# Altium PCB Flight-Controller.PcbDoc (part 2 of 3)
Units mm, origin at the board's own origin, x right, y up, seen from the top; angles counter-clockwise.
Board outline 68.4 x 90 mm, 8 copper layers (Top Layer (SIG), Int1 (GND), Int2 (PWR), Int3 (SIG), Int4 (GND), Int5 (SIG), Int6 (GND), Bottom Layer (SIG)), stack 1.559 mm thick; 188 components, 169 nets, 851 pads, 1097 vias.
Unrouted connection lines stored in the file: 2.
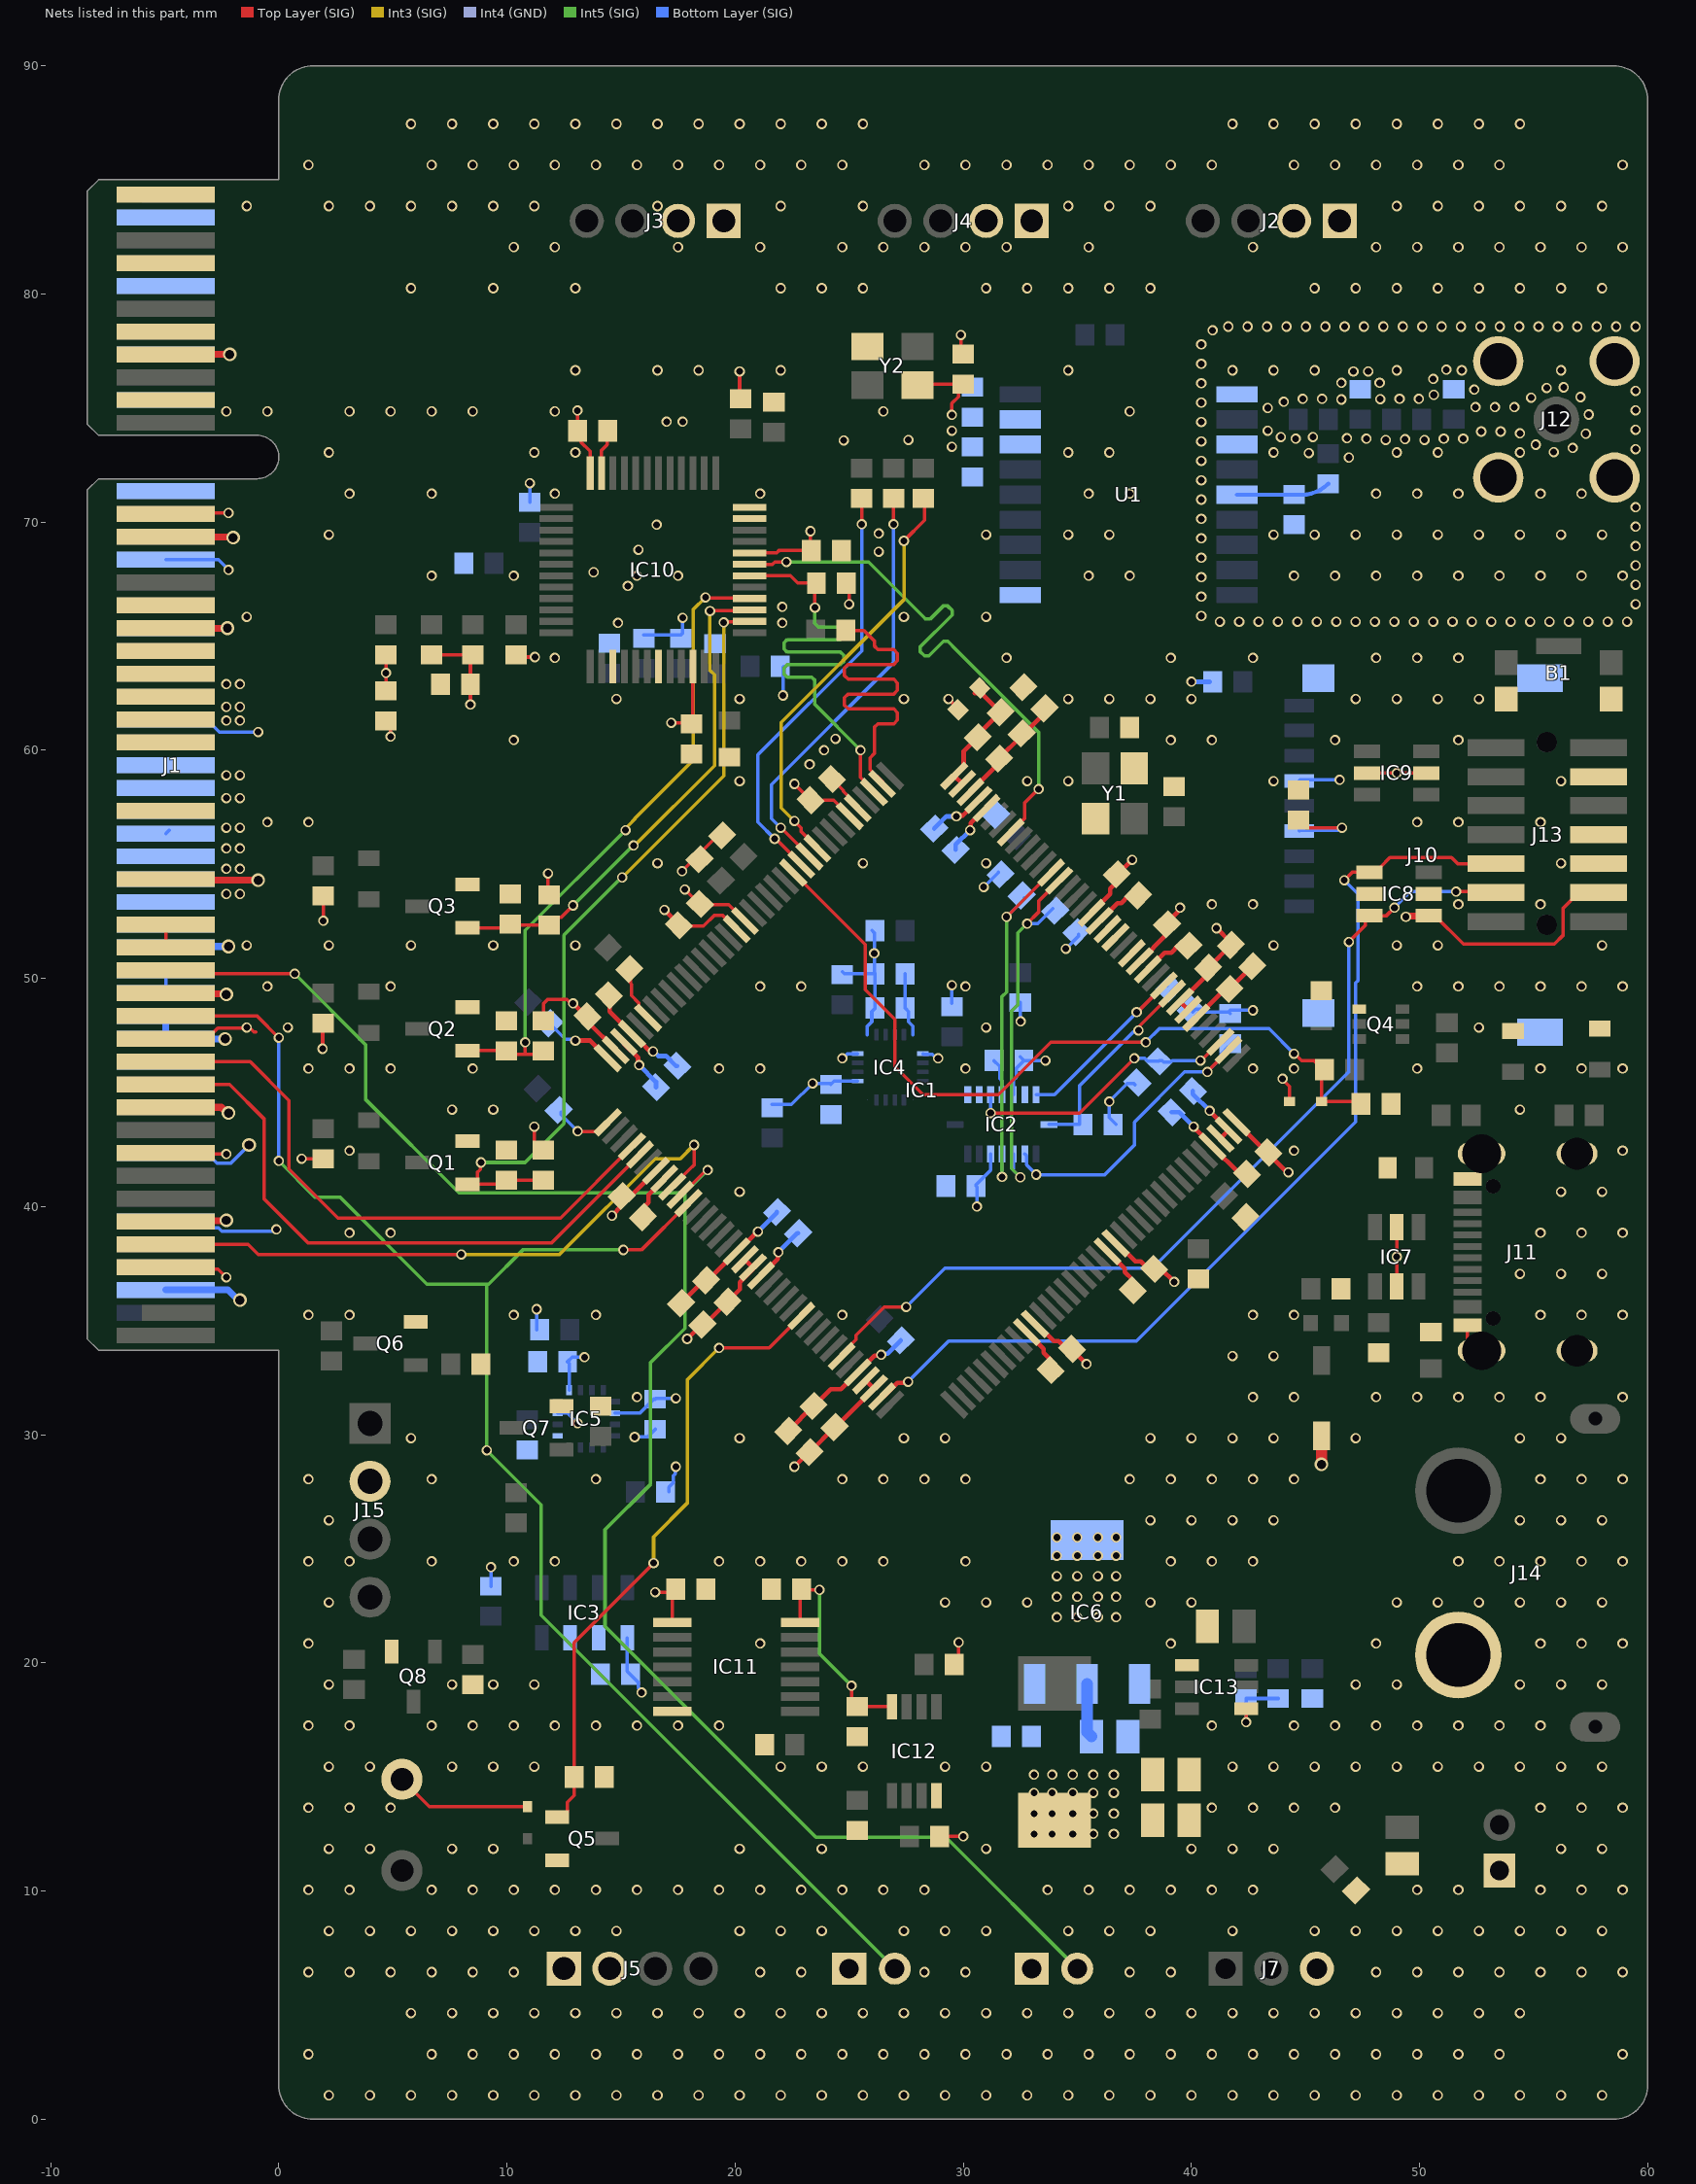
[diagram p8: the nets of this part, all layers, seen from the top]

## Part data
B1: "Tactile Switch SPST 300gf 1.9mm Gull Wing 4.6mm x 2.8mm Surface Mount", LCSC Part #=C99271, Manu Part #=KMR231GLFS
BZ1: "-40℃~+85℃ 2.7kHz 3V~7V 5.7mm 5V 60mA 80dB 9mm Electromagnetic Passive (Externally Driven) 插件,D=9mm Buzzers ROHS", LCSC Part #=C161819, Manu Part #=QMB-09B-05
C1 C42 C64 C65: library part CL21A226MAQNNNE, "22uF ±20% 25V Ceramic Capacitor X5R 0805", LCSC Part #=C45783, Manu Part #=CL21A226MAQNNNE
C2 C3 C5 C6 C7 C8 C9 C10 C11 C12 C13 C14 C15 C16 C17 C21 C22 C24 C26 C29 C30 C31 C32 C34 C37 C40 C44 C49 C50 C52 C53 C54 C56 C57 C58 C59 C60 C61 C62: library part CC0603KRX7R9BB104, "50V 100nF X7R ±10% 0603 Multilayer Ceramic Capacitors MLCC - SMD/SMT ROHS", LCSC Part #=C14663, Manu Part #=CC0603KRX7R9BB104
C4 C18 C25 C36 C51: library part CL10A105KB8NNNC, "50V 1uF X7R ±10% 0603 Multilayer Ceramic Capacitors MLCC - SMD/SMT ROHS", LCSC Part #=C15849, Manu Part #=CL10A105KB8NNNC
C19 C20 C35: library part CL10A225KO8NNNC, "2.2 µF ±10% 25V Ceramic Capacitor X5R 0603 (1608 Metric)", LCSC Part #=C23630, Manu Part #=CL10A225KO8NNNC
C23: library part CL10A475KO8NNNC, "16V 4.7uF X5R ±10% 0603 Multilayer Ceramic Capacitors MLCC - SMD/SMT ROHS", LCSC Part #=C19666, Manu Part #=CL10A475KO8NNNC
C27 C28: library part CL10C120JB8NNNC, "12pF ±1% 50V Ceramic Capacitor NP0 0603", LCSC Part #=C38523, Manu Part #=CL10C120JB8NNNC
C33 C39 C45: library part 0603B103K500NT, "10nF ±10% 50V Ceramic Capacitor X7R 0603", LCSC Part #=C57112, Manu Part #=0603B103K500NT
C38 C41 C43 C55: library part CL10A106KP8NNNC, "10uF ±10% 10V Ceramic Capacitor X5R 0603", LCSC Part #=C19702, Manu Part #=CL10A106KP8NNNC
C46 C66: library part CL10C470JB8NNNC, "47 pF ±5% 50V Ceramic Capacitor C0G, NP0 0603 (1608 Metric)", LCSC Part #=C1671, Manu Part #=CL10C470JB8NNNC
C47 C48: library part CC0603KRX7R9BB103, "10nF ±10% 50V Ceramic Capacitor X7R 0603", LCSC Part #=C100042, Manu Part #=CC0603KRX7R9BB103
C63: library part GRM21BR61H106KE43L, "10uF 50V X5R ±10% 0805 Multilayer Ceramic Capacitors MLCC - SMD/SMT ROHS", LCSC Part #=C440198, Manu Part #=GRM21BR61H106KE43L
D1: "25A 1 Independent 40V 450mV@1A 1A SOD-123 Single Diodes RoHS", LCSC Part #=C82544, Manu Part #=1N5819HW-7-F
D2 D3: "Diode 30V 200mA Surface Mount SOD-523", LCSC Part #=C81572, Manu Part #=BAT54XV2T1G
FB1: library part BLM18AG601SN1D, "380mΩ ±25% 600Ω@100MHz 0603 Ferrite Beads ROHS", LCSC Part #=C19330, Manu Part #=BLM18AG601SN1D
FB2: library part BLM18SG330SN1D, "33Ω@100MHz 1 Line Ferrite Bead 0603 6A 8mΩ", LCSC Part #=C576399, Manu Part #=BLM18SG330SN1D
IC1: "Dual 32-bit Arm Cortex-M7 and -M4 MCUs, up to 2MB Flash, 1MB RAM, 46 com. and analog interfaces, SMPS", LCSC Part #=C730193, Manu Part #=STM32H745ZIT6
IC2: "Inertial Measurement Unit IMU 6-Axis LGA", LCSC Part #=C194919, Manu Part #=BMI088
IC3: "Barometric Pressure Sensor, with Stainless Steel Cap, 1.8 to 3.6 V, -45 to 85 degC, 8-Pin QFN, RoHS, Tape and Reel", LCSC Part #=C15639, Manu Part #=MS561101BA03-50
IC4: "LGA24-3x3 IMUs (Inertial Measurement Units) RoHS", LCSC Part #=C5360621, Manu Part #=ICM-40609-D
IC5: "±8 Gauss, High Performance 3-axis Magnetic Sensor", LCSC Part #=C404329, Manu Part #=MMC5983MA
IC6: "70dB@(120Hz) 1.35A Fixed 3.3V Positive 10V SOT-223 Voltage Regulators - Linear, Low Drop Out (LDO) Regulators ROHS", LCSC Part #=C6186, Manu Part #=AMS1117-3.3
IC7 IC8 IC9: "Clamp Ipp Tvs Diode Surface Mount SOT-23-6", LCSC Part #=C495220, Manu Part #=ESDA6V1BC6
IC10: "Single Port 10/100 Mb/s Ethernet Physical Layer Transceiver", LCSC Part #=C12082, Manu Part #=DP83848IVVX/NOPB
IC11: "4-Bit Bidirectional Voltage-Level Translator For Open-Drain and Push-Pull Applications", LCSC Part #=C44955, Manu Part #=TXS0104EPWR
IC12: "SN74LVC2G241 Dual Buffer and Driver with Three-State Outputs", LCSC Part #=C2676069, Manu Part #=SN74LVC2G241DCTR
IC13: "3.8V to 32V Input, 3A Low IQ Synchronous Buck Converter with Enhanced EMI Reduction", LCSC Part #=C2158012, Manu Part #=AP63300WU-7
J1: "PCIe x8"
J2 J3 J4 J5: "Connector Header 4 position 2mm Pitch 2A Right Angle -25℃~+85℃", LCSC Part #=C157926, Manu Part #=S4B-PH-K-S(LF)(SN)
J6 J8 J9: "Connector Header 2 position 2mm Pitch 2A Right Angle -25℃~+85℃", LCSC Part #=C173752, Manu Part #=S2B-PH-K-S(LF)(SN)
J7: "Connector Header 3 position 2mm Pitch 2A Right Angle -25℃~+85℃", LCSC Part #=C157929, Manu Part #=S3B-PH-K-S(LF)(SN)
J10: "Micro SD card (TF card) Connector and Ejector Push-Push Surface Mount", LCSC Part #=C41426929, Manu Part #=TF-01A
J11: "USB 2.0 3A 1 Surface Mount, Right Angle 16P Female -40℃~+85℃ Type-C SMD USB Connectors ROHS", LCSC Part #=C2988369, Manu Part #=GT-USB-7010ASV
J12: "Connector Receptacle SMA Female Pin 50Ω Through Hole Right Angle", LCSC Part #=C496551, Manu Part #=BWSMA-KWE-Z001
J13: "Pin Header 2 1mm 4mm 14P -40℃~+105℃ 1.27mm 1A 250V 2x7P 1.27mm SMD,P=1.27mm Headers, Male Pins RoHS", LCSC Part #=C6332251, Manu Part #=HB-PH9-12727PB2GOB
J14: "Horizontal plug Yellow - Power connector / plug connector", LCSC Part #=C428722, Manu Part #=XT60PW-F
J15: "4 Position Wire to Board Terminal Block Through Hole 2.54mm", LCSC Part #=C918122, Manu Part #=DB125-2.54-4P-GN-S
L1: library part LQG18HN27NJ00D, "27 nH Unshielded Multilayer Inductor 500 mA 550mOhm Max 0603 (1608 Metric)", LCSC Part #=C162550, Manu Part #=LQG18HN27NJ00D
L2: library part FXL0630-6R8-M, "48mΩ 5A 6.8uH 6A Molded Inductor ±20% SMD,7x6.6mm Power Inductors ROHS", LCSC Part #=C167221, Manu Part #=FXL0630-6R8-M
LED1 LED3: library part KT-0603R, "-40℃~+85℃ 1.8V~2.4V 120° 20mA 300mcd 40mW 615nm~630nm 645nm Discrete Diode Red Water Clear 0603 LED Indication - Discrete ROHS", LCSC Part #=C2286, Manu Part #=KT-0603R
LED2 LED4: library part SML-E12P8WT86, "Green LED Indication - Discrete 2.2V 0603", LCSC Part #=C126319, Manu Part #=SML-E12P8WT86
LED5: library part SML-D12Y1WT86, "Yellow LED Indication - Discrete 2.2V 0603", LCSC Part #=C253534, Manu Part #=SML-D12Y1WT86
Q1 Q2 Q3 Q5 Q6 Q7 Q8: "N-Channel 60V 300mA 830mW Surface Mount SOT-23", LCSC Part #=C8545, Manu Part #=2N7002
Q4: "N-Channel+P-Channel Array 60V 130mA 200mW Surface Mount SOT-363", LCSC Part #=C156386, Manu Part #=BSS8402DW-7-F
R1 R29 R30 R31 R64 R66 R68: library part 0603WAF4700T5E, "-55℃~+155℃ 100mW 470Ω 75V Thick Film Resistor ±1% ±100ppm/℃ 0603 Chip Resistor - Surface Mount ROHS", LCSC Part #=C23179, Manu Part #=0603WAF4700T5E
R2 R27 R28: library part 0603WAF0000T5E, "0Ω 100mW 75V Thick Film Resistor ±1% 0603 Chip Resistor - Surface Mount RoHS", LCSC Part #=C21189, Manu Part #=0603WAF0000T5E
R3 R9 R10 R11 R12 R13 R14 R15 R16 R17 R18 R19 R20 R21 R22 R23 R48 R53 R54 R55 R56 R59 R61 R63 R65 R67 R69: library part 0603WAF1002T5E, "100mW Thick Film Resistor 75V ±100ppm/℃ ±1% 10kΩ 0603 Chip Resistor - Surface Mount ROHS", LCSC Part #=C25804, Manu Part #=0603WAF1002T5E
R4 R6 R24 R60: library part 0603WAF1001T5E, "100mW 1kΩ 75V Thick Film Resistor ±100ppm/℃ ±1% 0603 Chip Resistor - Surface Mount RoHS", LCSC Part #=C21190, Manu Part #=0603WAF1001T5E
R5 R7 R8 R41 R44 R45 R49: library part 0603WAF330JT5E, "100mW 33Ω 75V Thick Film Resistor ±100ppm/℃ ±1% 0603 Chip Resistor - Surface Mount RoHS", LCSC Part #=C23140, Manu Part #=0603WAF330JT5E
R25 R26: library part RC0603FR-075K1L, "100mW 5.1kΩ 75V Thick Film Resistor ±100ppm/℃ ±1% 0603 Chip Resistor - Surface Mount RoHS", LCSC Part #=C105580, Manu Part #=RC0603FR-075K1L
R32 R33 R34 R35 R36 R37 R38 R39 R40 R47: library part 0603WAF2201T5E, "2.2kΩ ±1% 100mW 0603 Thick Film Resistor", LCSC Part #=C4190, Manu Part #=0603WAF2201T5E
R42 R43 R50 R51: library part 0603WAF499JT5E, "-55℃~+155℃ 100mW 49.9Ω 75V Thick Film Resistor ±1% ±100ppm/℃ 0603 Chip Resistor - Surface Mount ROHS", LCSC Part #=C23185, Manu Part #=0603WAF499JT5E
R46: library part 0603WAF1501T5E, "100mW 1.5kΩ 75V Thick Film Resistor ±100ppm/℃ ±1% 0603 Chip Resistor - Surface Mount RoHS", LCSC Part #=C22843, Manu Part #=0603WAF1501T5E
R52: library part RC0603FR-074K87L, "4.87kΩ 100mW 75V Thick Film Resistor ±100ppm/℃ ±1% 0603 Chip Resistor - Surface Mount RoHS", LCSC Part #=C137709, Manu Part #=RC0603FR-074K87L
R57: library part 0603WAF1583T5E, "-55℃~+155℃ 100mW 158kΩ 75V Thick Film Resistor ±1% ±100ppm/℃ 0603 Chip Resistor - Surface Mount ROHS", LCSC Part #=C22883, Manu Part #=0603WAF1583T5E
R58: library part 0603WAF3002T5E, "-55℃~+155℃ 100mW 30kΩ 75V Thick Film Resistor ±1% ±100ppm/℃ 0603 Chip Resistor - Surface Mount ROHS", LCSC Part #=C22984, Manu Part #=0603WAF3002T5E
R62: library part 0603WAF1200T5E, "-55℃~+155℃ 100mW 120Ω 75V Thick Film Resistor ±1% ±100ppm/℃ 0603 Chip Resistor - Surface Mount ROHS", LCSC Part #=C22787, Manu Part #=0603WAF1200T5E
U1: "Standard precision GNSS module", LCSC Part #=C4153167, Manu Part #=MAX-M10S-00B
Y1: library part XC32M4-24.000-F12NJDTL, "Crystal 24MHz ±10ppm 12pF 50Ω SMD3225-4P", LCSC Part #=C5122304, Manu Part #=XC32M4-24.000-F12NJDTL
Y2: "Oscillator 50MHz ±20ppm CMOS 1.62V~3.63V SMD3225-4P", LCSC Part #=C2901592, Manu Part #=SX3M50.000M20F30TNN

## Via types
v1: diameter 0.45, hole 0.3, Top Layer (SIG) to Bottom Layer (SIG), tented both sides, 1085 vias
v2: diameter 0.6, hole 0.4, Top Layer (SIG) to Bottom Layer (SIG), tented both sides, 12 vias

## Nets (pads, with @x,y where several pads share a name; then routed paths per layer and width w, separated by ;. In a path a pad name is that pad's centre, name@x,y a point inside that pad or via, vN(x,y) a via of type N, cw(c..) or ccw(c..) an arc to the next point about the centre after c; other vN are vias at no path point)
+3V3: C3.2 C4.2 C5.2 C6.2 C7.2 C8.2 C9.2 C10.2 C11.2 C12.2 C13.2 C14.2 C15.2 C16.2 C21.2 C22.2 C23.2 C24.2 C25.2 C29.2 C30.2 C31.2 C32.2 C33.2 C34.2 C35.2 C36.2 C37.2 C42.2 C43.2 C44.2 C49.2 C50.2 C51.2 C53.2 C57.2 C58.2 C60.2 D3.1 FB1.1 IC1.7 IC1.8 IC1.13 IC1.19 IC1.32 IC1.42 IC1.56 IC1.70 IC1.71 IC1.79 IC1.90 IC1.91 IC1.92 IC1.105 IC1.106 IC1.119 IC1.129 IC1.142 IC1.143 IC1.144 IC2.3 IC2.11 IC3.1 IC4.8 IC4.13 IC5.2 IC5.13 IC6.2 IC6.4 IC8.1 IC10.22 IC10.32 IC10.48 IC11.1 J1.8 J1.14 J1.18 J1.20 J1.21 J1.22 J1.29 J1.34 J1.39 J1.44 J1.57 J1.67 J1.81 J1.84 J1.85 J1.90 J1.96 J3.2 J4.2 J5.2 J10.4 J13.3 R4.1 R6.1 R9.1 R10.1 R11.2 R12.2 R13.1 R14.1 R15.1 R16.2 R17.2 R18.2 R19.2 R20.2 R21.2 R22.2 R23.2 R29.2 R30.2 R31.2 R32.2 R33.2 R34.2 R38.2 R39.2 R42.2 R43.2 R46.1 R47.1 R48.1 R50.1 R51.1 U1.7 U1.8 Y2.4 | length 188.8
  Top Layer (SIG) w0.15: v1(1,42.1) 1.811,42.1 R29.2@1.95,41.961 ; v1(1.917,46.917) 1.925,46.925 1.925,47.875 R30.2@1.95,47.9 ; v1(1.95,52.525) R31.2@1.95,53.478 ; C57.2@4.7,62.6 v1(4.7,63.39) R42.2@4.7,64.18 ; R43.2@6.7,64.18 R51.1@8.5,64.18 8.4,64.08 C53.2@8.4,62.9 v1(8.4,62) ; R50.1@10.4,64.18 10.496,64.084 v1(11.224,64.084) ; v1(11.2,43.5) 11.205,43.495 11.205,42.825 11.405,42.625 R32.2@11.6,42.625 ; R33.2@11.6,48.275 11.6,48.9 11.784,49.084 12.635,49.084 12.819,48.9 v1(12.9,48.9) ; v1(11.8,54.6) 11.8,53.853 R34.2@11.85,53.803 ; v1@13.09,74.971 C50.2@13.09,74 13.25,73.84 13.25,73.5 13.65,73.1 IC10.48@13.65,72.138 ; v1(16.5,23.1) 17.265,23.1 C60.2@17.39,23.225 17.25,23.085 IC11.1@17.25,21.775 ; v1(17.2,61.2) 18.06,61.2 C51.2@18.1,61.16 18.15,61.21 IC10.22@18.15,63.662 ; C7.2@17.533,52.333 17.572,52.294 18.619,52.294 19.096,52.771 19.449,52.771 20.057,52.163 IC1.56@20.077,52.163 ; v1(17.675,54.7) R4.1@18.309,55.334 ; R4.1@18.309,55.341 R6.1@19.334,56.366 ; v1(20.2,76.6) 20.2,75.6 R47.1@20.25,75.55 ; IC10.32@20.638,68.65 21.825,68.65 21.925,68.75 C49.2@23.34,68.75 23.3,68.79 v1(23.3,69.6) ; v1(22.6,58.525) 23.308,57.817 C5.2@23.308,57.808 ; C5.2@23.347,57.769 23.828,57.769 23.867,57.808 24.325,57.808 25.021,57.112 IC1.42@25.027,57.112 ; v1(25,66.4) 25,67.3 R46.1@25.025,67.325 ; Y2.4@28,76 28.04,76.04 C58.2@30,76.04 29.788,75.828 29.788,75.488 29.5,75.2 v1(29.5,74.7) ; v1(29.35,62.25) 29.773,61.827 FB1.1@29.773,61.773 ; v1(44,45.6) 44,45.564 44.3,45.264 D3.1@44.3,44.6 ; C29.2@44.7,56.94 45.04,56.6 v1(46.6,56.6) ; IC8.1@50.4,52.75 50.675,52.75 51.925,51.5 55.9,51.5 56.3,51.9 56.3,53.09 56.97,53.76 J13.3@57.85,53.76
  Top Layer (SIG) w0.2: v1(12.9,48.9) 13.467,48.333 C6.2@13.533,48.333 13.533,48.099 IC1.71@14.773,46.859 ; v1(14.6,39.6) 14.6,39.605 15.033,40.038 C8.2@15.033,40.467 15.435,40.467 IC1.79@16.541,41.573 ; IC1.70@15.127,47.213 15.127,47.142 15.752,46.517 15.752,46.248 v1(15.8,46.2) ; v1(16.9,53) 17.533,52.367 C7.2@17.533,52.333 ; v1(17.9,34.2) 18.533,34.833 C25.2@18.567,34.833 18.667,34.833 C24.2@19.667,35.833 20.207,36.374 20.207,36.683 20.784,37.26 IC1.91@20.784,37.33 IC1.90@20.43,37.684 ; IC1.92@21.137,36.977 21.866,37.705 21.866,37.966 v1(21.9,38) ; v1(22.6,28.6) 23.233,29.233 C23.2@23.267,29.233 C9.2@24.367,30.333 ; C9.2@24.3,30.24 IC1.106@26.087,32.027 ; C9.2@24.38,30.32 IC1.106@26.087,32.027 ; IC1.105@25.734,32.381 IC1.106@26.087,32.027 ; v1(30.3,56.5) 30.332,56.532 30.332,56.81 30.988,57.466 IC1.32@31.02,57.466 ; IC1.119@33.141,34.855 33.212,34.855 33.967,34.1 34.177,34.1 34.51,33.767 C15.2@34.767,33.767 34.767,33.733 v1(35.4,33.1) ; IC1.19@35.616,52.87 36.446,53.7 36.446,53.93 36.733,54.217 C12.2@36.733,54.567 36.767,54.567 v1(37.4,55.2) ; IC1.129@36.677,38.391 36.747,38.391 37.539,37.6 37.777,37.6 38.11,37.267 38.683,37.267 v1(39.25,36.7) ; IC1.13@37.737,50.748 38.933,51.944 38.933,52.433 39.452,52.952 39.452,53.052 v1(39.5,53.1) ; IC1.7@39.859,48.627 IC1.8@39.505,48.981 40.733,50.209 C3.2@40.733,50.467 C4.2@41.733,51.467 41.733,51.567 v1(41.1,52.2) ; v1(40.8,44.2) 40.8,44.184 41.627,43.357 IC1.143@41.627,43.341 IC1.142@41.273,42.987 ; IC1.144@41.98,43.694 43.308,42.367 C11.2@43.367,42.367 43.367,42.333 44.2,41.5 v1(44.25,41.5)
  Top Layer (SIG) w0.3: J1.44@-4.95,39.35 -4.925,39.375 -2.325,39.375 v2(-2.3,39.4) ; J1.39@-4.95,44.35 -2.514,44.35 -2.264,44.1 v2(-2.2,44.1) ; J1.34@-4.95,49.35 -4.925,49.325 -2.325,49.325 v2(-2.3,49.3) ; J1.29@-4.95,54.35 -4.9,54.3 v2(-0.9,54.3) ; J1.18@-4.95,65.35 v2(-2.25,65.35) ; J1.14@-4.95,69.35 -4.935,69.335 -2.015,69.335 v2(-2,69.32) ; J1.8@-4.95,77.35 v2(-2.15,77.35) ; v1(49.4,52.7) 49.425,52.725 50.375,52.725 IC8.1@50.4,52.75
  Int4 (GND) w0.3: v2(-2.35,47.35) v2@-2.3,47.3
  Bottom Layer (SIG) w0.15: J1.90@-4.95,42.35 -3.15,42.35 -2.7,41.9 -2.1,41.9 v2(-1.3,42.7) ; R14.1@9.3,23.36 v1(9.3,24.2) ; R48.1@11,70.86 v1(11,71.7) ; R23.2@11.3,34.6 v1(11.3,35.5) ; C37.2@12.66,33.2 12.86,33.4 v1(13.4,33.4) ; IC5.13@12.725,31.96 C37.2@12.725,33.135 ; IC5.2@14.735,30.95 15.835,30.95 16.445,31.56 C36.2@16.5,31.56 16.54,31.6 v1(17.4,31.6) ; IC3.1@15.275,21.1 15.275,19.635 15.75,19.16 15.75,18.931 15.9,18.781 v1(15.9,18.7) ; R38.2@16,65.05 17.625,65.05 17.7,65.125 v1(17.7,65.8) ; R15.1@17.108,27.508 17.108,27.703 17.3,27.895 17.3,28.2 17.382,28.282 17.382,28.582 v1(17.4,28.6) ; R13.1@21.625,44.475 22.475,44.475 v1(23.4,45.4) 24.16,45.4 C33.2@24.2,45.36 24.34,45.5 IC4.8@25.37,45.5 ; R21.2@24.7,50.3 24.8,50.2 C35.2@26.14,50.2 ; IC4.13@25.8,47.525 25.8,47.9 25.993,48.093 25.993,48.553 C34.2@26.14,48.7 C35.2@26.14,50.2 ; R9.1@26,52.1 26.1,52 v1(26.1,51.1) 26.1,50.24 C35.2@26.14,50.2 ; R22.2@29.5,48.9 v1(29.5,49.7) ; C30.2@30.56,40.9 30.6,40.86 v1(30.6,40) ; C30.2@30.56,40.955 31.2,41.595 IC2.11@31.2,42.3 ; v1(30.9,54) 31.534,54.634 R19.2@31.534,54.666 ; IC2.3@32.2,44.9 32.2,45.543 32.32,45.663 32.32,46.06 C31.2@32.66,46.4 ; C31.2@32.5,46.56 C31.2@32.66,46.4 ; R10.1@32.5,48.94 32.5,48.129 v1(32.513,48.117) ; v1(33.6,46.4) C31.2@32.66,46.4 ; v1(34.5,51.3) 35.066,51.866 R20.2@35.066,51.934 ; R17.2@36.7,43.6 36.4,43.9 v1(36.4,44.6) 37.193,45.393 37.476,45.393 R12.2@37.534,45.334 ; R18.2@40.066,48.534 40.194,48.663 40.477,48.663 40.605,48.534 41.626,48.534 R11.2@41.7,48.46 ; R11.2@41.687,48.587 41.7,48.6 v1(42.7,48.6) ; J10.4@44.72,56.46 44.76,56.5 46.419,56.5 46.519,56.6 v1(46.6,56.6)
  Bottom Layer (SIG) w0.2: v1(15.8,46.2) 16.533,45.467 C21.2@16.533,45.233 ; v1(21.9,38) 22.733,38.833 C16.2@22.767,38.833 ; C13.2@29.667,55.633 29.667,55.867 v1(30.3,56.5) ; v1(40,63) R16.2@40.8,63 ; C22.2@40.067,45.067 40.067,44.933 v1(40.8,44.2)
  Bottom Layer (SIG) w0.3: J1.96@-4.95,36.35 -2.231,36.35 -1.781,35.9 v2(-1.7,35.9) ; J1.84@-4.95,48.35 J1.85@-4.95,47.35 v2(-2.35,47.35) ; J1.81@-4.95,51.35 -4.9,51.4 v2(-2.2,51.4) ; J1.67@-4.95,65.35 v2(-2.25,65.35) ; J1.57@-4.95,77.35 v2(-2.15,77.35)
  Bottom Layer (SIG) w0.5: IC6.2@35.425,19.075 35.425,16.975 C42.2@35.625,16.775
  other v1: 34.1,22 35,22 35.9,22 36.7,22 34.1,22.9 35,22.9 35.9,22.9 36.7,22.9 34.1,23.8 35,23.8 35.9,23.8 36.7,23.8 34.1,24.7 35,24.7 35.9,24.7 36.7,24.7 34.1,25.5 35,25.5 35.9,25.5 36.7,25.5 -2.3,61.3 -1.7,61.3 -2.3,61.9 -1.7,61.9 -2.3,62.9 -1.7,62.9 29.5,73.3 29.5,74 13.09,74.89
+3V3_RF: C45.2 L1.2 U1.14 | length 4.1
  Bottom Layer (SIG) w0.185: U1.14@42,71.2 C45.2@44.5,71.2 44.841,71.2 ccw(c44.841,72.839) L1.2@46,71.68
"+3V3A FC": C17.2 C18.2 FB1.2 IC1.35 IC1.36 | length 5.6
  Top Layer (SIG) w0.2: IC1.35@29.959,58.527 IC1.36@29.606,58.88 30.021,59.296 30.021,59.955 C17.2@30.633,60.567 30.633,60.667 C18.2@31.633,61.667 30.8,62.5 FB1.2@30.5,62.5
+5V: BZ1.1 C41.2 C59.2 C61.2 C64.2 C65.2 C66.2 D1.1 D2.1 IC6.3 IC11.14 IC12.8 IC13.1 J1.73 J1.74 J1.75 J1.76 J1.77 J1.78 J1.79 J2.2 J15.2 L2.2 R53.2 R54.2 R57.2 | length 22
  Top Layer (SIG) w0.15: BZ1.1@5.4,14.9 6.6,13.7 D2.1@10.9,13.7 ; IC11.14@22.85,21.775 22.85,23.165 C61.2@22.91,23.225 22.935,23.2 v1(23.7,23.2) ; v1(25.1,19) 25.1,18.28 25.295,18.085 C59.2@25.35,18.085 26.865,18.085 IC12.8@26.875,18.075 ; R54.2@29.1,12.4 v1(30,12.4) ; R53.2@29.75,19.925 29.8,19.975 v1(29.8,20.9) ; v1(42.4,17.4) IC13.1@42.4,18
  Top Layer (SIG) w0.5: v2(45.7,28.7) D1.1@45.7,29.95
  Int5 (SIG) w0.15: v1(23.7,23.2) 23.7,20.4 v1(25.1,19)
  Bottom Layer (SIG) w0.15: J1.76@-4.95,56.35 J1.76@-4.8,56.5 ; v1(42.4,17.4) C66.2@42.4,18.44 R57.2@43.8,18.44
  other v1: 33.1,12.5 33.9,12.5 34.8,12.5 35.7,12.5 36.6,12.5 33.1,13.4 33.9,13.4 34.8,13.4 35.7,13.4 36.6,13.4 33.1,14.3 33.9,14.3 34.8,14.3 35.7,14.3 36.6,14.3 33.1,15.1 33.9,15.1 34.8,15.1 35.7,15.1 36.6,15.1 -2.3,53.7 -1.7,53.7 -2.3,54.8 -1.7,54.8 -2.3,55.7 -1.7,55.7 -2.3,56.6 -1.7,56.6 -2.3,57.9 -1.7,57.9 -2.3,58.9 -1.7,58.9
ADC1_INP9: D3.2 IC1.49 R60.1 R62.2 | length 34.6
  Top Layer (SIG) w0.15: IC1.49@22.552,54.638 25.7,51.489 25.7,49.5 27,48.2 27,46.134 28.234,44.9 31.534,44.9 33.834,47.2 v1(38,47.2) ; v1(44.5,46.7) 44.536,46.7 44.836,46.4 45.375,46.4 45.7,46.075 D3.2@45.7,44.6 47.1,44.6 R62.2@47.3,44.4
  Bottom Layer (SIG) w0.15: v1(38,47.2) 38.6,47.8 43.4,47.8 v1(44.5,46.7)
AGND: C17.1 C18.1 IC1.34 R2.2 | length 5
  Top Layer (SIG) w0.2: IC1.34@30.313,58.173 31.567,59.427 C17.1@31.567,59.633 32.567,60.633 C18.1@32.567,60.733 32.665,60.733 R2.2@33.666,61.734
"AN0 / LED_LINK": IC10.28 Q2.1 R33.1 R36.2 | length 28.6
  Top Layer (SIG) w0.15: Q2.1@8.275,46.837 9.813,46.837 9.975,46.675 10.8,46.675 ; v1(10.8,47.2) 10.8,46.675 ; R33.1@11.6,46.675 10.8,46.675 ; v1(18.7,66.7) 18.725,66.675 20.613,66.675 IC10.28@20.638,66.65
  Int5 (SIG) w0.15: v1(10.8,47.2) 10.8,52.1 v1(15.2,56.5)
  Int3 (SIG) w0.15: v1(15.2,56.5) 15.2,56.581 15.328,56.709 15.618,56.999 15.618,57.018 18.175,59.575 18.175,66.175 v1(18.7,66.7)
"AN1 / LED_SPEED": IC10.27 Q3.1 R34.1 R37.2 | length 22.5
  Top Layer (SIG) w0.15: Q3.1@8.275,52.214 9.989,52.214 R37.2@10.15,52.375 10.182,52.343 R34.1@11.905,52.343 ; R34.1@11.85,52.343 12.19,52.683 12.383,52.683 v1(12.9,53.2) ; v1(18.9,66.1) 18.925,66.125 20.613,66.125 IC10.27@20.638,66.15
  Int5 (SIG) w0.15: v1(12.9,53.2) 12.912,53.2 15.537,55.825 v1(15.55,55.825)
  Int3 (SIG) w0.15: v1(15.55,55.825) 15.6,55.825 19.1,59.325 19.1,63.3 18.9,63.5 v1(18.9,66.1)
"AN_EN / LED_ACT": IC10.26 Q1.1 R32.1 R35.2 | length 34.9
  Top Layer (SIG) w0.15: Q1.1@8.275,40.978 Q1.1@8.475,40.978 ; v1(8.863,41.933) 8.83,41.899 8.83,41.63 8.7,41.5 8.7,41.203 Q1.1@8.475,40.978 ; R32.1@11.6,41.165 R35.2@9.975,41.165 9.788,40.978 Q1.1@8.475,40.978 ; v1(19.5,65.6) 19.525,65.625 20.613,65.625 IC10.26@20.638,65.65
  Int5 (SIG) w0.15: v1(8.863,41.933) 10.793,41.933 12.5,43.64 12.5,51.9 15.025,54.425 v1(15.05,54.425)
  Int3 (SIG) w0.15: v1(15.05,54.425) 19.5,58.875 v1(19.5,65.6)
"BACKPLANE RX": IC1.76 J1.37 | length 26.3
  Top Layer (SIG) w0.15: J1.37@-4.95,46.35 -1.25,46.35 0.45,44.65 0.45,41.65 2.6,39.5 12.347,39.5 IC1.76@15.481,42.634
"BACKPLANE TX": IC1.77 J1.38 | length 27.3
  Top Layer (SIG) w0.15: J1.38@-4.95,45.35 -2.15,45.35 -0.65,43.85 -0.65,40.35 1.3,38.4 11.954,38.4 IC1.77@15.834,42.28
BMI_ACC_CS: IC1.2 IC2.14 R11.1 | length 14
  Top Layer (SIG) w0.15: v1(40.7,45.9) 40.7,45.916 41.627,46.843 IC1.2@41.627,46.859
  Bottom Layer (SIG) w0.15: IC2.14@32.7,42.3 32.772,42.228 32.772,41.828 v1(33.2,41.4) 36.2,41.4 37.5,42.7 37.5,43.7 39.7,45.9 v1(40.7,45.9) 41.3,46.5 41.3,46.675 41.625,47 R11.1@41.7,47
BMI_ACC_INT1: IC1.9 IC2.16 R17.1 | length 8.9
  Top Layer (SIG) w0.15: v1(37.683,47.717) 37.74,47.775 37.74,47.931 39.143,49.334 IC1.9@39.152,49.334
  Bottom Layer (SIG) w0.15: IC2.16@33.75,43.6 35.1,43.6 35.1,45.3 37.46,47.66 37.625,47.66 v1(37.683,47.717)
BMI_ACC_INT2: IC1.10 IC2.1 R18.1 | length 9.4
  Top Layer (SIG) w0.15: v1(37.6,48.517) 37.622,48.517 38.793,49.688 IC1.10@38.798,49.688
  Bottom Layer (SIG) w0.15: IC2.1@33.2,44.9 34,44.9 37.6,48.5 v1(37.6,48.517) ; v1@37.609,48.509 38.766,49.666 R18.1@38.934,49.666
BMI_GYRO_CS: IC1.3 IC2.5 R12.1 | length 12.3
  Top Layer (SIG) w0.15: v1(31.2,44.1) 35.1,44.1 v1(37.5,46.5) ; v1(40.4,46.4) 40.43,46.4 41.243,47.213 IC1.3@41.273,47.213
  Bottom Layer (SIG) w0.15: v1(31.2,44.1) IC2.5@31.2,44.9 ; v1(37.5,46.5) 37.953,46.5 38.086,46.367 R12.1@38.567,46.367 38.6,46.4 38.719,46.4 38.791,46.328 39.086,46.328 39.159,46.4 v1(40.4,46.4)
BMI_GYRO_INT1: IC1.24 IC2.12 R19.1 | length 16.4
  Top Layer (SIG) w0.15: v1(31.9,52.7) 31.905,52.7 33.843,54.638 IC1.24@33.848,54.638
  Int5 (SIG) w0.15: v1(31.7,41.3) 31.7,49.2 31.9,49.4 v1(31.9,52.7)
  Bottom Layer (SIG) w0.15: v1(31.7,41.3) IC2.12@31.7,42.3 ; v1(31.9,52.7) 32.666,53.466 R19.1@32.666,53.534
BMI_GYRO_INT2: IC1.23 IC2.13 R20.1 | length 16.6
  Top Layer (SIG) w0.15: v1(32.8,52.4) 33.3,52.9 33.3,53.382 IC1.23@34.202,54.284
  Int5 (SIG) w0.15: v1(32.5,41.284) 32.113,41.671 32.113,48.564 32.4,48.851 32.4,52 v1(32.8,52.4)
  Bottom Layer (SIG) w0.15: IC2.13@32.2,42.3 32.2,41.581 32.497,41.284 v1(32.5,41.284) ; v1(32.8,52.4) 33.269,52.4 R20.1@33.934,53.066
BUZZER_PWM: IC1.97 Q5.1 R63.2 | length 27.8
  Top Layer (SIG) w0.15: Q5.1@12.2,13.25 12.425,13.25 12.65,13.475 12.65,13.895 12.94,14.185 R63.2@12.94,15 12.94,20.888 v1(16.43,24.377) ; v1(19.3,33.8) 21.496,33.8 IC1.97@22.905,35.209
  Int3 (SIG) w0.15: v1(16.43,24.377) 16.43,25.53 17.9,27 17.9,32.4 v1(19.3,33.8)
CRS_DV: IC1.46 R49.1 | length 18.5
  Top Layer (SIG) w0.15: v1(22.6,56.9) 22.9,56.6 22.9,56.436 23.612,55.724 IC1.46@23.612,55.698 ; v1(27.4,69.175) 28.3,70.075 28.3,70.85 R49.1@28.25,70.9
  Int3 (SIG) w0.15: v1(22.6,56.9) 22.025,57.475 22.025,61.225 27.4,66.6 v1(27.4,69.175)
DEBUG_SWCLK: IC1.107 IC8.4 J13.6 | length 43.6
  Top Layer (SIG) w0.15: v1(46.7,54.3) 47.05,54.65 IC8.4@47.8,54.65 ; IC8.4@48.075,54.65 48.3,54.875 48.3,54.9 48.7,55.3 51.4,55.3 51.67,55.03 J13.6@53.45,55.03
  Top Layer (SIG) w0.2: IC1.107@26.441,31.673 26.511,31.673 27.115,32.277 27.536,32.277 v1(27.584,32.324)
  Bottom Layer (SIG) w0.15: v1(27.584,32.324) 29.36,34.1 37.591,34.1 47.2,43.709 47.2,49.8 47.3,49.9 47.3,53.7 v1(46.7,54.3)
DEBUG_SWDIO: IC1.102 IC8.6 J13.4 | length 40.9
  Top Layer (SIG) w0.15: IC1.102@24.673,33.441 24.673,33.547 25.3,34.174 25.3,34.366 26.534,35.6 v1(27.5,35.6) ; v1(46.9,51.6) 47.613,52.313 47.613,52.563 IC8.6@47.8,52.75 48.55,52.75 v1(48.9,53.1) ; v1(51.6,53.8) 53.41,53.8 J13.4@53.45,53.76
  Bottom Layer (SIG) w0.15: v1(27.5,35.6) 29.2,37.3 38.3,37.3 46.9,45.9 v1(46.9,51.6) ; v1(48.9,53.1) 49.6,53.8 v1(51.6,53.8)
DGND: B1.3 B1.4 C1.1 C2.1 C3.1 C4.1 C5.1 C6.1 C7.1 C8.1 C9.1 C10.1 C11.1 C12.1 C13.1 C14.1 C15.1 C16.1 C19.1 C20.1 C21.1 C22.1 C23.1 C24.1 C25.1 C26.1 C27.1 C28.1 C29.1 C30.1 C31.1 C32.1 C33.1 C34.1 C35.1 C36.1 C37.1 C38.2 C39.1 C40.1 C41.1 C42.1 C43.1 C44.1 C45.1 C47.1 C48.1 C49.1 C50.1 C51.1 C52.1 C53.1 C54.1 C55.1 C56.2 C57.1 C58.1 C59.1 C60.1 C61.1 C63.1 C64.1 C65.1 IC1.6 IC1.12 IC1.14 IC1.16 IC1.17 IC1.18 IC1.33 IC1.41 IC1.55 IC1.69 IC1.80 IC1.89 IC1.104 IC1.118 IC1.128 IC1.141 IC2.2 IC2.4 IC2.6 IC2.7 IC3.2 IC3.3 IC4.11 IC4.18 IC4.20 IC5.9 IC5.11 IC6.1 IC7.2 IC7.5 IC8.2 IC8.5 IC9.2 IC9.5 IC10.15 IC10.19 IC10.35 IC10.36 IC10.47 IC11.7 IC12.4 IC13.4 J1.1 J1.4 J1.7 J1.10 J1.13 J1.17 J1.19 J1.23 J1.26 J1.31 J1.32 J1.36 J1.41 J1.46 J1.51 J1.54 J1.59 J1.61 J1.64 J1.71 J1.80 J1.82 J1.83 J1.86 J1.93 J2.1 J3.1 J4.1 J5.1 J6.1 J7.3 J8.1 J9.1 J10.6 J10.10 J10.11 J10.12 J10.13 J11.1 J11.2 J11.3 J11.4 J11.A1B12 J11.B1A12 J12.1 J12.2 J12.3 J12.4 J13.5 J13.7 J13.11 J14.4 LED1.1 LED2.1 Q1.2 Q2.2 Q3.2 Q4.1 Q5.2 Q6.2 Q7.2 Q8.2 R2.1 R3.2 R25.2 R26.2 R35.1 R36.1 R37.1 R40.1 R52.2 R55.1 R56.1 R58.1 R61.1 R62.1 R63.1 R65.1 R67.1 R69.1 U1.1 U1.10 U1.12 Y1.2 Y1.4 Y2.2 | length 91.4
  Top Layer (SIG) w0.15: J1.46@-4.95,37.35 -4.863,37.263 -2.663,37.263 v1(-2.3,36.9) ; J1.41@-4.95,42.35 -4.9,42.3 v1(-2.3,42.3) ; J1.36@-4.95,47.35 -3.15,47.35 -2.675,47.825 -1.256,47.825 -1.081,47.65 -1,47.65 ; J1.32@-4.95,51.35 J1.31@-4.95,52.35 ; J1.13@-4.95,70.35 -4.9,70.4 v1(-2.2,70.4) ; C57.1@4.7,61.28 4.9,61.08 v1(4.9,60.6) ; IC10.47@14.15,72.138 14.15,73.15 14.393,73.393 14.393,73.983 C50.1@14.41,74 ; IC10.19@16.65,63.662 IC10.19@16.675,63.637 ; v1(17.8,53.9) 18.433,53.267 C7.1@18.467,53.267 18.506,53.228 19.719,53.228 IC1.55@20.43,52.516 ; C5.1@24.242,58.742 24.743,58.241 24.743,58.19 25.38,57.553 IC1.41@25.38,57.466 ; v1(29.9,78.2) 29.9,77.46 C58.1@30,77.36 ; IC9.2@47.7,59 IC9.5@50.3,59 ; IC7.5@49,36.5 IC7.2@49,39.1 ; J11.A1B12@52.1,34.8 52.1,34.073 52.493,33.68 J11.1@52.72,33.68
  Top Layer (SIG) w0.2: C6.1@14.467,49.267 14.506,49.228 14.506,48.541 15.896,47.151 15.926,47.151 16.229,46.848 16.352,46.848 v1(16.4,46.8) ; C8.1@15.967,39.533 15.967,39.943 16.2,40.176 16.2,40.525 IC1.80@16.895,41.219 ; C25.1@17.633,35.767 18.633,36.767 18.806,36.767 IC1.89@20.077,38.037 20.107,38.037 20.97,38.9 v1(21,38.9) ; C23.1@22.333,30.167 C9.1@23.433,31.267 ; C9.1@23.399,31.2 24.193,31.994 24.64,31.994 IC1.104@25.38,32.734 26.108,33.463 26.363,33.463 v1(26.4,33.5) ; v1(29.7,57.1) 29.741,57.141 29.988,57.141 IC1.33@30.666,57.819 ; IC1.118@32.788,34.502 33.521,33.768 33.521,33.591 33.833,33.279 C15.1@33.833,32.833 ; IC1.18@35.97,52.516 36.754,53.3 36.924,53.3 37.257,53.633 C12.1@37.667,53.633 ; IC1.128@36.323,38.037 37.084,37.276 37.084,37.128 37.433,36.779 C10.1@37.433,36.333 ; IC1.12@38.091,50.395 38.825,51.128 39.116,51.128 39.421,51.433 C14.1@39.867,51.433 ; v1(40.1,43.5) 40.1,43.477 40.919,42.657 IC1.141@40.919,42.634 42.12,41.433 C11.1@42.433,41.433 ; IC1.6@40.212,48.274 41.472,49.533 C3.1@41.667,49.533 C4.1@42.667,50.533
  Bottom Layer (SIG) w0.15: J1.93@-4.95,39.35 -4.675,39.075 -2.647,39.075 -2.497,38.925 -0.175,38.925 v1(-0.1,39) ; J1.83@-4.95,49.35 J1.82@-4.95,50.35 ; J1.71@-4.95,61.35 -3.15,61.35 -2.6,60.8 v1(-0.9,60.8) ; J1.64@-4.95,68.35 -2.65,68.35 v1(-2.2,67.9) ; IC5.11@12.215,30.95 12.65,30.95 v1(13.1,30.5) ; v1(15.6,29.9) 16.16,29.9 C36.1@16.5,30.24 ; v1(22.1,62.4) 22.1,63.65 C55.1@22.125,63.675 ; v1(24.7,46.5) 24.728,46.5 24.926,46.698 25.368,46.698 IC4.11@25.37,46.7 ; C35.1@27.46,50.2 C34.1@27.46,48.7 27.607,48.553 27.607,48.093 27.8,47.9 IC4.18@27.8,47.53 ; IC4.20@28.23,46.7 28.255,46.675 28.644,46.675 28.819,46.5 v1(28.9,46.5) ; C31.1@31.34,46.4 31.6,46.14 31.6,45.6 31.7,45.5 IC2.4@31.7,44.9 ; J10.6@44.72,58.66 44.76,58.7 v1(46.5,58.7)
  Bottom Layer (SIG) w0.2: v1(16.4,46.8) 16.442,46.8 16.642,46.6 16.977,46.6 17.41,46.167 C21.1@17.467,46.167 ; v1(21,38.9) 21.833,39.733 C16.1@21.833,39.767 ; v1(26.4,33.5) 26.448,33.548 26.681,33.548 C20.1@27.267,34.133 ; C13.1@28.733,56.567 29.267,57.1 v1(29.7,57.1) ; C22.1@39.133,44.133 39.467,44.133 v1(40.1,43.5)
  other v1: 2.2,1.05 4,1.05 5.8,1.05 7.6,1.05 9.4,1.05 11.2,1.05 13,1.05 14.8,1.05 16.6,1.05 18.4,1.05 20.2,1.05 22,1.05 23.8,1.05 25.6,1.05 27.4,1.05 29.2,1.05 31,1.05 32.8,1.05 34.6,1.05 36.4,1.05 38.2,1.05 40,1.05 41.8,1.05 43.6,1.05 45.4,1.05 47.2,1.05 49,1.05 50.8,1.05 52.6,1.05 54.4,1.05 56.2,1.05 58,1.05 1.3,2.85 6.7,2.85 8.5,2.85 10.3,2.85 12.1,2.85 13.9,2.85 15.7,2.85 17.5,2.85 19.3,2.85 21.1,2.85 22.9,2.85 24.7,2.85 26.5,2.85 28.3,2.85 30.1,2.85 31.9,2.85 33.7,2.85 35.5,2.85 37.3,2.85 39.1,2.85 40.9,2.85 42.7,2.85 44.5,2.85 46.3,2.85 48.1,2.85 49.9,2.85 51.7,2.85 53.5,2.85 58.9,2.85 5.8,4.65 7.6,4.65 9.4,4.65 11.2,4.65 13,4.65 14.8,4.65 16.6,4.65 18.4,4.65 20.2,4.65 22,4.65 23.8,4.65 25.6,4.65 27.4,4.65 29.2,4.65 31,4.65 32.8,4.65 34.6,4.65 36.4,4.65 38.2,4.65 40,4.65 41.8,4.65 43.6,4.65 45.4,4.65 47.2,4.65 49,4.65 50.8,4.65 52.6,4.65 54.4,4.65 1.3,6.45 3.1,6.45 4.9,6.45 6.7,6.45 8.5,6.45 10.3,6.45 21.1,6.45 22.9,6.45 28.3,6.45 30.1,6.45 37.3,6.45 39.1,6.45 48.1,6.45 49.9,6.45 51.7,6.45 53.5,6.45 55.3,6.45 57.1,6.45 58.9,6.45 2.2,8.25 4,8.25 5.8,8.25 7.6,8.25 9.4,8.25 11.2,8.25 13,8.25 14.8,8.25 20.2,8.25 22,8.25 23.8,8.25 27.4,8.25 29.2,8.25 31,8.25 34.6,8.25 36.4,8.25 38.2,8.25 41.8,8.25 45.4,8.25 47.2,8.25 49,8.25 50.8,8.25 52.6,8.25 54.4,8.25 56.2,8.25 58,8.25 1.3,10.05 3.1,10.05 6.7,10.05 8.5,10.05 10.3,10.05 12.1,10.05 13.9,10.05 15.7,10.05 17.5,10.05 19.3,10.05 21.1,10.05 22.9,10.05 24.7,10.05 26.5,10.05 28.3,10.05 33.7,10.05 35.5,10.05 37.3,10.05 39.1,10.05 40.9,10.05 42.7,10.05 49.9,10.05 51.7,10.05 55.3,10.05 57.1,10.05 58.9,10.05 2.2,11.85 4,11.85 7.6,11.85 9.4,11.85 20.2,11.85 23.8,11.85 31,11.85 40,11.85 41.8,11.85 43.6,11.85 56.2,11.85 58,11.85 1.3,13.65 3.1,13.65 4.9,13.65 40.9,13.65 42.7,13.65 44.5,13.65 46.3,13.65 55.3,13.65 57.1,13.65 58.9,13.65 2.2,15.45 4,15.45 7.6,15.45 9.4,15.45 11.2,15.45 22,15.45 23.8,15.45 25.6,15.45 29.2,15.45 31,15.45 41.8,15.45 43.6,15.45 45.4,15.45 47.2,15.45 49,15.45 50.8,15.45 52.6,15.45 54.4,15.45 56.2,15.45 58,15.45 1.3,17.25 3.1,17.25 6.7,17.25 8.5,17.25 10.3,17.25 12.1,17.25 13.9,17.25 15.7,17.25 17.5,17.25 19.3,17.25 40.9,17.25 44.5,17.25 46.3,17.25 48.1,17.25 49.9,17.25 51.7,17.25 53.5,17.25 55.3,17.25 2.2,19.05 7.6,19.05 9.4,19.05 11.2,19.05 47.2,19.05 49,19.05 54.4,19.05 56.2,19.05 58,19.05 1.3,20.85 21.1,20.85 39.1,20.85 48.1,20.85 55.3,20.85 57.1,20.85 58.9,20.85 2.2,22.65 29.2,22.65 31,22.65 32.8,22.65 38.2,22.65 40,22.65 49,22.65 50.8,22.65 52.6,22.65 54.4,22.65 56.2,22.65 58,22.65 1.3,24.45 3.1,24.45 6.7,24.45 10.3,24.45 12.1,24.45 19.3,24.45 21.1,24.45 22.9,24.45 24.7,24.45 26.5,24.45 30.1,24.45 39.1,24.45 40.9,24.45 42.7,24.45 51.7,24.45 53.5,24.45 55.3,24.45 57.1,24.45 58.9,24.45 2.2,26.25 38.2,26.25 40,26.25 41.8,26.25 43.6,26.25 54.4,26.25 56.2,26.25 58,26.25 1.3,28.05 6.7,28.05 13.9,28.05 24.7,28.05 26.5,28.05 28.3,28.05 30.1,28.05 37.3,28.05 39.1,28.05 40.9,28.05 42.7,28.05 44.5,28.05 55.3,28.05 57.1,28.05 58.9,28.05 5.8,29.85 20.2,29.85 27.4,29.85 29.2,29.85 38.2,29.85 40,29.85 41.8,29.85 43.6,29.85 47.2,29.85 54.4,29.85 56.2,29.85 15.7,31.65 42.7,31.65 44.5,31.65 48.1,31.65 49.9,31.65 51.7,31.65 53.5,31.65 55.3,31.65 58.9,31.65 41.8,33.45 43.6,33.45 1.3,35.25 3.1,35.25 10.3,35.25 13.9,35.25 24.7,35.25 42.7,35.25 44.5,35.25 55.3,35.25 57.1,35.25 58.9,35.25 54.4,37.05 56.2,37.05 58,37.05 49,37.8 3.1,38.85 4.9,38.85 55.3,38.85 57.1,38.85 58.9,38.85 20.2,40.65 56.2,40.65 58,40.65 3.1,42.45 44.5,42.45 58.9,42.45 7.6,44.25 9.4,44.25 54.4,44.25 1.3,46.05 3.1,46.05 4.9,46.05 8.5,46.05 19.3,46.05 21.1,46.05 30.1,46.05 42.7,46.05 44.5,46.05 49.9,46.05 55.3,46.05 57.1,46.05 58.9,46.05 -1.4,47.85 0.4,47.85 31,47.85 52.6,47.85 -0.5,49.65 4.9,49.65 21.1,49.65 22.9,49.65 30.1,49.65 49.9,49.65 51.7,49.65 53.5,49.65 55.3,49.65 57.1,49.65 58.9,49.65 -1.4,51.45 2.2,51.45 5.8,51.45 9.4,51.45 13,51.45 43.6,51.45 49,51.45 50.8,51.45 58,51.45 40.9,53.25 42.7,53.25 51.7,53.25 55.3,53.25 16.6,55.05 25.6,55.05 31,55.05 56.2,55.05 -0.5,56.85 1.3,56.85 49.9,56.85 51.7,56.85 55.3,56.85 20.2,58.65 32.8,58.65 34.6,58.65 43.6,58.65 56.2,58.65 49,59 23.266,59.381 23.9,60 10.3,60.45 39.1,60.45 40.9,60.45 46.3,60.45 51.7,60.45 24.4,60.5 14.8,62.25 20.2,62.25 27.4,62.25 34.6,62.25 36.4,62.25 38.2,62.25 40,62.25 47.2,62.25 49,62.25 50.8,62.25 52.6,62.25 12.1,64.05 31.9,64.05 39.1,64.05 42.7,64.05 48.1,64.05 49.9,64.05 51.7,64.05 14.866,65.581 22.066,65.581 41.245,65.633 42.095,65.633 42.945,65.633 43.795,65.633 44.645,65.633 45.495,65.633 46.345,65.633 47.195,65.633 48.045,65.633 48.895,65.633 49.745,65.633 50.595,65.633 51.445,65.633 52.295,65.633 53.145,65.633 53.995,65.633 54.845,65.633 55.695,65.633 56.545,65.633 57.395,65.633 58.245,65.633 59.095,65.633 -1.4,65.85 27.4,65.85 31,65.85 40.433,65.885 22.066,66.281 59.467,66.398 40.433,66.735 15.3,67.2 59.467,67.248 40.433,67.585 6.7,67.65 10.3,67.65 15.7,67.65 17.5,67.65 35.5,67.65 37.3,67.65 44.5,67.65 46.3,67.65 48.1,67.65 49.9,67.65 51.7,67.65 53.5,67.65 55.3,67.65 57.1,67.65 58.9,67.65 13.8,67.8 59.467,68.098 40.433,68.435 26.3,68.7 15.766,68.781 59.467,68.948 40.433,69.285 2.2,69.45 31,69.45 34.6,69.45 36.4,69.45 43.6,69.45 45.4,69.45 47.2,69.45 49,69.45 50.8,69.45 52.6,69.45 54.4,69.45 56.2,69.45 58,69.45 26.3,69.5 59.467,69.798 16.566,69.881 40.433,70.135 59.467,70.648 40.433,70.985 3.1,71.25 6.7,71.25 12.1,71.25 21.1,71.25 35.5,71.25 37.3,71.25 48.1,71.25 49.9,71.25 51.7,71.25 55.3,71.25 57.1,71.25 40.433,71.835 40.433,72.685 46.903,72.828 45.15,73.025 2.2,73.05 11.2,73.05 13,73.05 34.6,73.05 36.4,73.05 43.6,73.05 49,73.05 50.8,73.05 54.4,73.05 55.878,73.07 59.467,73.198 56.708,73.252 55.091,73.391 40.433,73.535 24.766,73.581 48.517,73.597 50.215,73.597 27.6,73.6 49.366,73.633 44.575,73.65 46.819,73.674 47.669,73.652 51.063,73.652 51.913,73.652 43.925,73.725 45.325,73.725 57.291,73.871 54.399,73.885 52.703,73.967 53.553,73.967 43.35,74 59.467,74.048 40.433,74.385 17,74.4 17.7,74.4 57.418,74.711 -2.3,74.85 -0.5,74.85 3.1,74.85 4.9,74.85 6.7,74.85 8.5,74.85 12.1,74.85 26.5,74.85 37.3,74.85 59.467,74.898 43.35,75 52.452,75.033 53.302,75.033 54.152,75.033 40.433,75.235 44.05,75.275 46.575,75.371 48.274,75.385 44.876,75.403 45.726,75.403 49.124,75.403 49.974,75.403 54.891,75.454 57.054,75.48 50.625,75.575 59.467,75.748 52.4,75.8 55.575,75.875 56.318,75.904 40.433,76.085 46.575,76.1 48.25,76.1 50.6,76.275 47.1,76.6 47.75,76.6 13,76.65 16.6,76.65 18.4,76.65 22,76.65 34.6,76.65 41.8,76.65 43.6,76.65 45.4,76.65 49,76.65 51.85,76.65 56.2,76.65 51.175,76.675 40.433,76.935 40.433,77.785 40.929,78.404 41.617,78.567 42.467,78.567 43.317,78.567 44.167,78.567 45.017,78.567 45.867,78.567 46.717,78.567 47.567,78.567 48.417,78.567 49.267,78.567 50.117,78.567 50.967,78.567 51.817,78.567 52.667,78.567 53.517,78.567 54.367,78.567 55.217,78.567 56.067,78.567 56.917,78.567 57.767,78.567 58.617,78.567 59.467,78.567 5.8,80.25 9.4,80.25 13,80.25 22,80.25 23.8,80.25 25.6,80.25 31,80.25 32.8,80.25 34.6,80.25 36.4,80.25 38.2,80.25 45.4,80.25 47.2,80.25 49,80.25 50.8,80.25 52.6,80.25 54.4,80.25 56.2,80.25 58,80.25 10.3,82.05 12.1,82.05 17.5,82.05 21.1,82.05 24.7,82.05 26.5,82.05 28.3,82.05 30.1,82.05 31.9,82.05 35.5,82.05 42.7,82.05 48.1,82.05 49.9,82.05 51.7,82.05 53.5,82.05 55.3,82.05 57.1,82.05 58.9,82.05 -1.4,83.85 2.2,83.85 4,83.85 5.8,83.85 7.6,83.85 9.4,83.85 11.2,83.85 16.6,83.85 22,83.85 25.6,83.85 34.6,83.85 36.4,83.85 38.2,83.85 49,83.85 50.8,83.85 52.6,83.85 54.4,83.85 56.2,83.85 58,83.85 1.3,85.65 6.7,85.65 8.5,85.65 10.3,85.65 12.1,85.65 13.9,85.65 15.7,85.65 17.5,85.65 19.3,85.65 21.1,85.65 22.9,85.65 24.7,85.65 28.3,85.65 30.1,85.65 31.9,85.65 33.7,85.65 35.5,85.65 37.3,85.65 39.1,85.65 40.9,85.65 44.5,85.65 46.3,85.65 48.1,85.65 49.9,85.65 51.7,85.65 53.5,85.65 58.9,85.65 5.8,87.45 7.6,87.45 9.4,87.45 11.2,87.45 13,87.45 14.8,87.45 16.6,87.45 18.4,87.45 20.2,87.45 22,87.45 23.8,87.45 25.6,87.45 41.8,87.45 43.6,87.45 45.4,87.45 47.2,87.45 49,87.45 50.8,87.45 52.6,87.45 54.4,87.45
"ESC1 PWM": IC1.82 J1.33 J8.2 | length 78.6
  Top Layer (SIG) w0.15: J1.33@-4.95,50.35 -4.8,50.2 v1(0.7,50.2) ; IC1.82@17.602,40.512 17.657,40.512 18.745,41.6 v1(18.8,41.6)
  Int5 (SIG) w0.15: v1(0.7,50.2) 3.8,47.1 3.8,44.7 7.9,40.6 17.8,40.6 ; v1(18.8,41.6) 17.8,40.6 ; J8.2@35,6.6 29.246,12.354 23.546,12.354 14.3,21.6 14.3,25.834 16.3,27.834 16.3,33.166 17.8,34.666 17.8,40.6
"ESC2 PWM": IC1.83 J1.35 J9.2 | length 69.8
  Top Layer (SIG) w0.15: J1.35@-4.95,48.35 -0.95,48.35 v1(0,47.4) ; v1(15.1,38.1) 15.897,38.1 IC1.83@17.955,40.159
  Int5 (SIG) w0.15: v1(0,42) 1.6,40.4 2.7,40.4 6.5,36.6 9.117,36.6 ; v1(15.1,38.1) 10.7,38.1 9.2,36.6 9.117,36.6 ; J9.2@27,6.6 11.5,22.1 11.5,26.934 v1(9.117,29.317) 9.117,36.6
  Bottom Layer (SIG) w0.15: v1(0,42) v1(0,47.4)
ETH_MDC: IC1.29 IC10.31 | length 24.7
  Top Layer (SIG) w0.15: IC10.31@20.638,68.15 21.644,68.15 21.744,68.25 v1(22.25,68.25) ; IC1.29@32.081,56.405 32.7,57.025 32.7,57.7 v1(33.3,58.3)
  Int5 (SIG) w0.15: v1(22.25,68.25) 25.85,68.25 28.3,65.8 28.353,65.747 28.548,65.747 29.122,66.321 29.316,66.321 29.51,66.127 29.51,65.932 28.104,64.526 28.104,64.331 28.298,64.137 28.493,64.137 29.131,64.775 29.325,64.775 29.694,64.406 33.3,60.8 v1(33.3,58.3)
ETH_MDIO: IC1.39 IC10.30 R46.2 | length 22.7
  Top Layer (SIG) w0.15: IC10.30@20.638,67.65 22.425,67.65 22.75,67.325 R46.2@23.425,67.325 ; v1(23.5,66.25) R46.2@23.5,67.25 ; v1(25.5,60) 25.5,58.813 26.087,58.226 IC1.39@26.087,58.173
  Int5 (SIG) w0.15: v1(23.5,66.25) 23.5,65.7 23.5,65.537 23.638,65.4 24.624,65.4 24.762,65.262 24.762,64.987 24.624,64.85 22.288,64.85 22.15,64.712 22.15,64.437 22.288,64.3 24.624,64.3 24.762,64.162 24.762,63.887 24.624,63.75 22.288,63.75 22.15,63.612 22.15,63.337 22.288,63.2 23.363,63.2 23.5,63.062 23.5,62.987 23.5,62 v1(25.5,60)
ETH_REF_CLK: IC1.38 R45.1 | length 18
  Top Layer (SIG) w0.15: R45.1@25,65.25 25.65,65.25 26.1,64.8 26.1,64.65 26.1,64.575 26.263,64.412 26.955,64.412 27.117,64.25 27.117,63.925 26.955,63.762 24.956,63.762 24.793,63.6 24.793,63.275 24.956,63.112 26.955,63.112 27.117,62.95 27.117,62.625 26.955,62.462 24.956,62.462 24.793,62.3 24.793,61.975 24.956,61.812 26.955,61.812 27.117,61.65 27.117,61.325 26.955,61.162 26.263,61.162 26.1,61 26.1,60.402 26.1,59.85 25.916,59.666 25.916,59.157 26.441,58.633 IC1.38@26.441,58.527
ETH_RXD0: IC1.47 R41.1 | length 18.5
  Top Layer (SIG) w0.15: v1(22,56.6) 22.027,56.6 23.259,55.368 IC1.47@23.259,55.345 ; v1(26.95,69.9) R41.1@26.95,70.9
  Bottom Layer (SIG) w0.15: v1(22,56.6) 21.6,57 21.6,58.5 26.95,63.85 v1(26.95,69.9)
ETH_RXD1: IC1.48 R44.1 | length 18.6
  Top Layer (SIG) w0.15: v1(21.733,56.119) 21.779,56.119 22.905,54.993 IC1.48@22.905,54.991 ; v1(25.55,69.9) R44.1@25.55,70.9
  Bottom Layer (SIG) w0.15: v1(21.733,56.119) 21,56.852 21,59.8 25.55,64.35 v1(25.55,69.9)
ETH_TX_EN: IC1.67 R8.1 | length 2.4
  Top Layer (SIG) w0.15: R8.1@15.466,50.309 15.413,50.256 15.413,49.797 15.466,49.744 15.466,49.243 15.772,48.936 15.772,48.689 IC1.67@16.188,48.274
ETH_TXD0: IC1.72 R5.1 | length 3
  Top Layer (SIG) w0.2: v1(13,47.275) 13.651,47.275 IC1.72@14.42,46.506
  Bottom Layer (SIG) w0.15: R5.1@11.966,47.934 12.568,47.332 12.943,47.332 v1(13,47.275)
ETH_TXD1: IC1.73 R7.1 | length 2.6
  Top Layer (SIG) w0.15: v1(13.1,43.3) 13.121,43.279 14.004,43.279 IC1.73@14.42,43.694
  Bottom Layer (SIG) w0.15: R7.1@12.366,44.134 12.366,44.034 v1(13.1,43.3)
EXTRA_PD11: IC1.81 J1.45 | length 27.6
  Top Layer (SIG) w0.15: J1.45@-4.95,38.35 -1.35,38.35 -0.9,37.9 v1(8,37.9) ; IC1.81@17.248,40.866 18,41.618 18.2,41.818 v1(18.2,42.7)
  Int3 (SIG) w0.15: v1(8,37.9) 12.3,37.9 16.5,42.1 17.6,42.1 v1(18.2,42.7)